# Altium PCB Clock.PcbDoc (part 2 of 2)
Units mil, origin at the board's own origin, x right, y up, seen from the top; angles counter-clockwise.
Board outline 5314.96 x 2362.2 mil, 2 copper layers (Top Layer, Bottom Layer); 149 components, 176 nets, 886 pads, 8 vias.
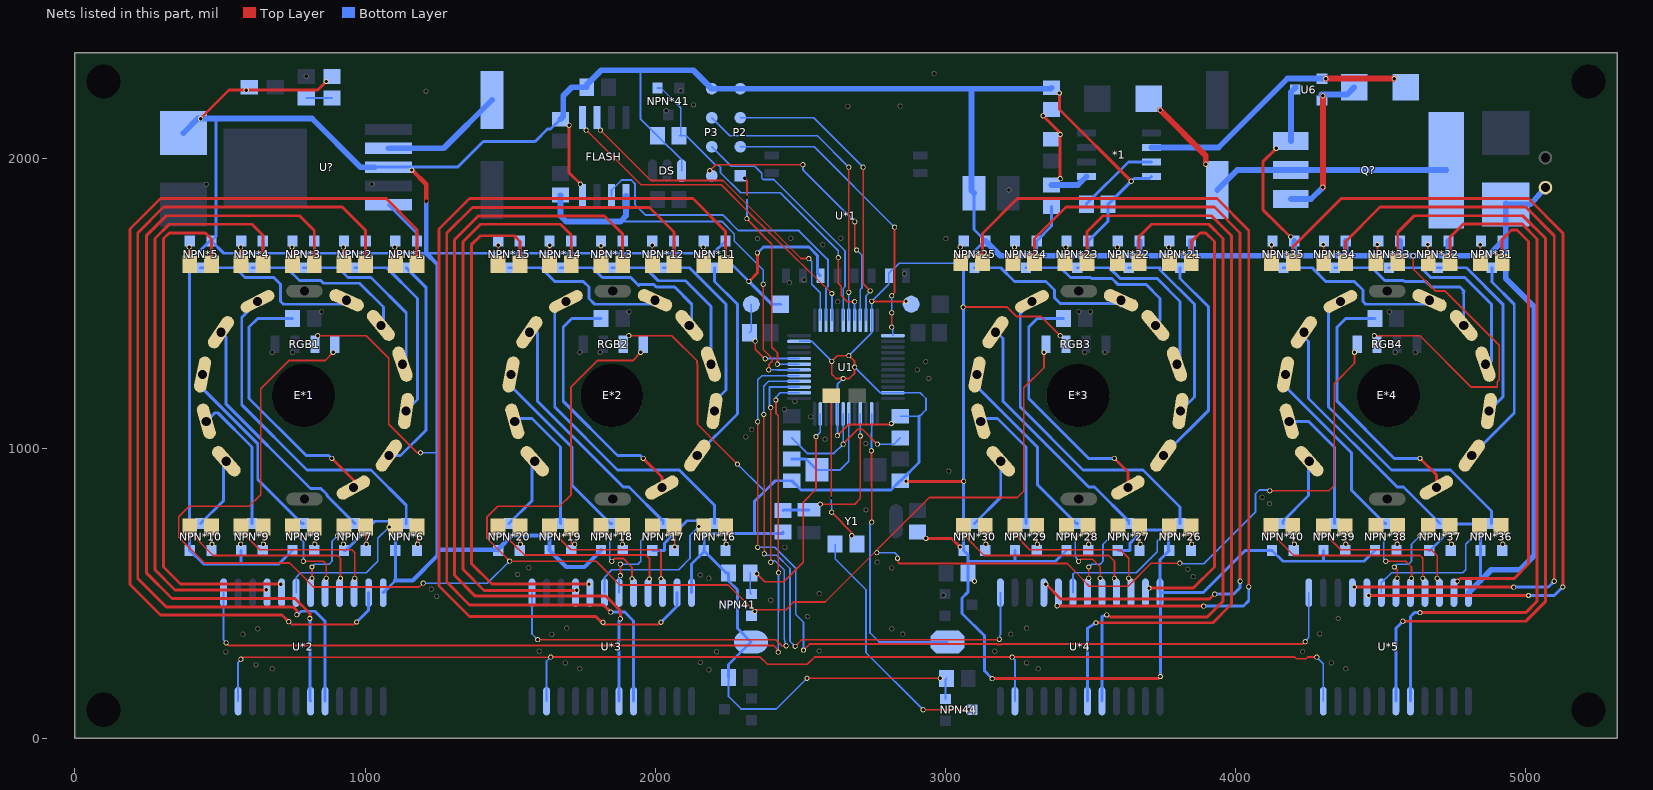
[diagram p2: the nets of this part, all layers, seen from the top]

## Via types
v1: diameter 19.68, hole 11.81, Top Layer to Bottom Layer, 3 vias
v2: diameter 11.81, hole 11.81, Top Layer to Bottom Layer, 3 vias
v3: diameter 17.72, hole 11.81, Top Layer to Bottom Layer, 2 vias

## Nets (pads, with @x,y where several pads share a name; then routed paths per layer and width w, separated by ;. In a path a pad name is that pad's centre, name@x,y a point inside that pad or via, vN(x,y) a via of type N, cw(c..) or ccw(c..) an arc to the next point about the centre after c; other vN are vias at no path point) (continued)
GND: *1.4 BAT?.2 C1.1 C2.1 C3.1 C4.1 C5.1 C6.1 C7.2 C8.1 C9.2 C10.2 C11.2 D3.2 D6.1 DS.1 FLASH.4 J1.1 NPN44.2 NPN*1.2 NPN*2.2 NPN*3.2 NPN*4.2 NPN*5.2 NPN*6.2 NPN*7.2 NPN*8.2 NPN*9.2 NPN*10.2 NPN*11.2 NPN*12.2 NPN*13.2 NPN*14.2 NPN*15.2 NPN*16.2 NPN*17.2 NPN*18.2 NPN*19.2 NPN*20.2 NPN*21.2 NPN*22.2 NPN*23.2 NPN*24.2 NPN*25.2 NPN*26.2 NPN*27.2 NPN*28.2 NPN*29.2 NPN*30.2 NPN*31.2 NPN*32.2 NPN*33.2 NPN*34.2 NPN*35.2 NPN*36.2 NPN*37.2 NPN*38.2 NPN*39.2 NPN*40.2 P2.4 P3.4 P6.1 P7.2 pad.1@3393,2224 pad.1@5068,1898 pad.2@3640.47,1920 pad.8@3161,206 pad.9@3741,213 pad.10@4140,2033 pad.11@4190,1728 pad.13@570.87,669.29 pad.16@433.07,2135.83 pad.16@925.2,669.29 pad.17@590.55,2234.25 pad.18@866.14,2263.78 pad.19@1161.42,1958.66 pad.20@1210.63,1850.39 pad.21@2523,207 pad.22@2982.28,206.69 pad.24@3100.39,541.34 pad.25@2933.07,688.98 pad.26@3051.18,659.45 pad.27@2864.17,885.83 pad.28@3062.99,885.83 pad.29@2627.95,1043.31 pad.30@2814,1085 pad.31@2667.32,1318.9 pad.32@2687.01,1279.53 pad.33@2647.64,1240.16 pad.34@2608.27,1299.21 pad.35@2746.06,1505.91 pad.36@2864.17,1505.91 pad.37@3395.67,1387.8 pad.38@4478.35,1387.8 pad.39@1909.45,1387.8 pad.40@836.61,1387.8 pad.41@4612,1663 pad.42@3061.02,1486.22 pad.43@2283.46,944.88 pad.44@1190.94,984.25 pad.45@1742.13,1910 pad.46@1703,2113 pad.69@2352,1673 pad.70 Q?.S R53.2 R54.2 R55.2 R56.2 R59.2 R60.2 RGB1.3 RGB2.3 RGB3.3 RGB4.3 U1.8 U1.23 U1.35 U1.47 U6.3 U*1.9 U*1.13 U*2.12 U*3.12 U*4.12 U*5.12 U?.3 U?.5 | length 31114.7
  Top Layer w6: pad.40@836.61,1387.8 1003.94,1387.8 1081.34,1310.39 1081.34,1082.85 1179.94,984.25 pad.44@1190.94,984.25 ; pad.39@1909.45,1387.8 2057.09,1387.8 2144.33,1300.55 2144.33,1290.63 2145.67,1289.29 2145.67,1082.68 pad.43@2283.46,944.88 ; pad.21@2523,207 pad.22@2982.28,206.69 ; pad.29@2627.95,1043.31 2666.65,1082 pad.30@2805.8,1082 ; pad.35@2746.06,1505.91 pad.36@2864.17,1505.91 ; pad.42@3061.02,1486.22 3213.53,1486.22 3246.31,1453.44 3330.02,1453.44 pad.37@3395.67,1387.8 ; pad.38@4478.35,1387.8 4635.83,1387.8 4812.99,1210.63 4901.57,1210.63 4901.57,1227.89 4909.29,1235.6 4909.29,1354.36 4721.57,1542.08 4688.23,1542.08 4612.66,1617.66 4612.66,1662.34 pad.41@4612,1663 ; 2608.27,1254.73 2622.84,1240.16 pad.33@2647.64,1240.16 2669.16,1240.16 2687.01,1258.01 pad.32@2687.01,1279.53 2687.01,1299.21 pad.31@2667.32,1318.9 2627.95,1318.9 pad.34@2608.27,1299.21 2608.27,1254.73
  Top Layer w10: pad.16@433.07,2135.83 531.5,2234.25 pad.17@590.55,2234.25 836.61,2234.25 pad.18@866.14,2263.78 ; pad.46@1703,2113 1702.76,1949.37 pad.45@1742.13,1910 ; pad.70@2322.83,1574.8 2352.36,1604.33 pad.69@2352,1673 ; pad.27@2864.17,885.83 pad.28@3062.99,885.83 ; pad.25@2933.07,688.98 3021.65,688.98 pad.26@3051.18,659.45 ; pad.8@3161,206 3734,206 pad.9@3741,213 ; pad.1@3393,2224 3393,2167.47 pad.2@3640.47,1920 ; pad.10@4140,2033 4094,1987 4094,1822 pad.11@4190,1728
  Top Layer w15: pad.19@1161.42,1958.66 1210.63,1909.45 pad.20@1210.63,1850.39
  Bottom Layer w6: pad.44@1190.94,984.25 1250,984.25 ; 1946,2302.68 1949,2299.68 1949,2136 1948.6,2136 R60.2@2007.6,2077 2091,1993.6 DS.1@2091,1956 ; R55.2@2252.6,210 2252.6,144.4 2296,101 2417,101 pad.21@2523,207 ; pad.43@2283.46,944.88 2372.05,856.3 2381.89,856.3 ; U1.23@2496.06,1368.11 2539.37,1368.11 pad.34@2608.27,1299.21 ; pad.29@2627.95,1043.31 U1.8@2627.95,1118.11 2627.95,1220.47 pad.33@2647.64,1240.16 ; pad.31@2667.32,1318.9 2746.06,1397.64 U1.35@2746.06,1440.94 pad.35@2746.06,1505.91 2805.12,1564.96 2805.12,1602.32 2840.4,1637.6 3058.4,1637.6 3062.99,1642.2 ; pad.32@2687.01,1279.53 2775.59,1190.94 U1.47@2818.9,1190.94 2913.39,1190.94 2933.07,1171.26 2933.07,1131.89 2911.42,1110.24 ; J1.1@2844.49,1110.24 2909,1110.24 ; NPN44.2@3000.08,135.83 3000.08,202.83 R59.2@3003.94,206.69
  Bottom Layer w10: 486,2135.83 486,1730.02 NPN*5.2@470.47,1714.49 ; NPN*9.2@572.83,647.72 572.83,602.36 570.87,600.39 ; NPN*4.2@647.64,1714.49 647.64,1673.91 649.61,1671.94 ; NPN*8.2@750,647.72 702.68,600.39 570.87,600.39 ; NPN*3.2@824.8,1714.49 824.8,1673.91 826.77,1671.94 ; NPN*7.2@927.17,647.72 933.15,647.72 1033.64,748.2 1090.9,748.2 1091.76,747.35 1093.2,747.35 1104.33,736.22 NPN*6.2@1104.33,647.72 1104.33,543.9 U*2.12@1062.4,501.97 ; NPN*2.2@1001.97,1714.49 1001.97,1679.82 994.09,1671.94 ; U?.3@1032.48,1968.5 U?.3@1080.71,1968.5 1318.9,1968.5 1407.48,2057.09 1586.14,2057.09 1628.7,2099.65 1639.02,2099.65 C2.1@1673.23,2133.86 ; U?.5@1080.71,1838.58 1179.13,1740.16 NPN*1.2@1179.13,1714.49 1179.13,1673.91 1181.1,1671.94 ; NPN*15.2@1533.47,1714.49 1533.47,1673.91 1535.43,1671.94 ; NPN*14.2@1710.63,1714.49 1710.63,1673.91 1712.6,1671.94 ; NPN*13.2@1887.8,1714.49 1887.8,1673.91 1889.76,1671.94 ; NPN*17.2@1990.16,647.72 2032.24,647.72 2032.24,672.63 2109.47,749.86 2158.23,749.86 2169.86,738.23 2169.86,721.77 2169,720.92 2169,708.66 ; NPN*12.2@2064.96,1714.49 2064.96,1673.91 2066.93,1671.94 ; U*3.12@2125.39,501.97 2125.39,600.64 2167.32,642.57 NPN*16.2@2167.32,647.72 ; R55.2@2252.6,210 2252.6,254.42 BAT?.2@2330.38,332.2 2283.46,379.12 2283.46,511.81 2252.6,542.68 R54.2@2252.6,570 2245.04,570 NPN*16.2@2167.32,647.72 ; pad.69@2352,1673 2372.87,1693.87 2372.99,1693.87 2529.53,1692.91 2559.06,1663.39 2559.06,1604.33 U*1.13@2568.9,1594.49 ; P6.1@2431.1,1496.06 2401.57,1496.06 2242.13,1655.51 NPN*11.2@2242.13,1714.49 2199.58,1671.94 2066.93,1671.94 ; C4.1@2440.94,710.63 2440.94,706.54 2342.52,706.54 ; 2909,1110.24 2909,950.78 2846.02,887.8 C6.1@2844.49,887.8 2812.99,856.3 2501.97,856.3 C5.1@2470.47,887.8 2413.39,887.8 2381.89,856.3 2342.52,816.93 2342.52,706.54 ; C9.2@3098.74,1879.06 3098.74,1753.54 NPN*25.2@3137.8,1714.49 3135.28,1714.49 3062.99,1642.2 pad.28@3062.99,885.83 NPN*30.2@3062.99,647.72 3077.4,633.31 3077.4,610.24 ; pad.8@3161,206 3134.33,232.67 3134.33,353.46 3057.56,430.23 3057.56,483.93 3077.4,503.77 R56.2@3077.4,570 3077.4,610.24 ; NPN*29.2@3240.16,647.72 3240.16,612.2 3238.19,610.24 ; 3307.09,1663.39 3314.96,1671.26 NPN*24.2@3314.96,1714.49 3366.14,1765.67 R53.2@3366.14,1832.68 ; NPN*28.2@3417.32,647.72 3379.84,610.24 3238.19,610.24 ; 3494.09,1663.39 3492.13,1665.35 NPN*23.2@3492.13,1714.49 3561.02,1783.39 C7.2@3561.02,1840.55 pad.2@3640.47,1920 3649.61,1929.13 3703.15,1929.13 *1.4@3710.63,1936.61 ; NPN*27.2@3594.49,647.72 3636.58,647.72 3636.58,672.63 3682.62,718.68 3758.23,718.68 3769.86,707.04 3769.86,690.59 3769,689.74 3769,647.72 NPN*26.2@3771.65,647.72 3739.57,615.63 U*4.12@3739.57,501.97 ; pad.9@3741,213 3741,500.54 U*4.12@3739.57,501.97 ; NPN*39.2@4303.15,647.72 4303.15,610.31 ; NPN*38.2@4480.31,647.72 4442.91,610.31 4303.15,610.31 ; NPN*37.2@4667.32,647.72 4669.84,647.72 4760.31,738.19 4822.83,738.19 4844.49,716.54 NPN*36.2@4844.49,647.72 4844.49,543.9 ; NPN*5.2@470.47,1714.49 464.49,1714.49 395.23,1645.23 395.23,648.15 NPN*10.2@395.67,647.72 442.99,600.39 570.87,600.39 ; NPN*5.2@470.47,1714.49 513.02,1671.94 649.61,1671.94 ; 649.61,1671.94 826.77,1671.94 ; 826.77,1671.94 994.09,1671.94 ; 994.09,1671.94 1181.1,1671.94 ; 1181.1,1671.94 1210.63,1671.94 1535.43,1671.94 ; 1535.43,1671.94 1712.6,1671.94 ; 1712.6,1671.94 1889.76,1671.94 ; 1889.76,1671.94 2066.93,1671.94 ; NPN*16.2@2167.32,647.72 2169,647.72 2169,708.66 ; 2169,708.66 2178.67,708.66 2180.79,706.54 2342.52,706.54 ; 3077.4,610.24 3238.19,610.24 ; U*4.12@3739.57,501.97 3887.8,501.97 4033.54,647.72 NPN*40.2@4125.98,647.72 4163.39,610.31 4303.15,610.31
  Bottom Layer w15: 1104.33,543.9 1163.98,543.9 1250,629.92 1250,649.61 ; pad.20@1210.63,1850.39 1210.63,1671.94 1250,1632.57 1250,984.25 1250,649.61 ; NPN*18.2@1812.99,647.72 1755.83,590.55 1692.99,590.55 NPN*19.2@1635.83,647.72 1635.83,687.01 1624.02,698.82 1505.91,698.82 1458.66,651.57 NPN*20.2@1458.66,647.72 1456.77,649.61 1250,649.61
  Bottom Layer w20: C11.2@374.02,2086.61 423.23,2135.83 pad.16@433.07,2135.83 816.93,2135.83 984.25,1968.5 U?.3@1032.48,1968.5 ; C2.1@1673.23,2133.86 1683.07,2143.7 1683.07,2214.57 1712.6,2244.09 C1.1@1763.78,2244.09 1763.78,2252.69 1813.76,2302.68 1946,2302.68 2131.18,2302.68 P3.4@2194.88,2238.98 P2.4@2293.31,2238.98 3090,2238.98 ; C9.2@3098.74,1879.06 3090,1887.8 3090,2238.98 ; NPN*25.2@3137.8,1714.49 3188.9,1663.39 3307.09,1663.39 3494.09,1663.39 3664,1663.39 ; C8.1@3366.14,2242.13 3362.99,2238.98 3090,2238.98 ; NPN*22.2@3669.29,1714.49 3669.29,1668.68 3664,1663.39 ; NPN*21.2@3846.46,1714.49 3846.46,1665.35 3848.43,1663.39 ; Q?.S@4190.94,2058.66 4190.94,2227.36 U6.3@4207.68,2244.09 ; 4202.44,1663.7 NPN*35.2@4202.44,1714.25 ; 4379.61,1663.7 NPN*34.2@4379.61,1714.25 ; NPN*33.2@4566.61,1714.25 4566.61,1672.91 4557.09,1663.39 ; NPN*32.2@4733.94,1714.25 4733.94,1663.7 4734.25,1663.39 ; U*5.12@4802.56,501.97 4844.49,543.9 4881.3,580.71 4980.31,580.71 5029.53,629.92 5029.53,1486.22 4931.1,1584.65 NPN*31.2@4931.1,1724.41 ; C10.2@4932.59,1843.85 C10.2@4931.1,1840.55 ; pad.1@5068,1898 5016.55,1840.55 C10.2@4931.1,1840.55 ; 3664,1663.39 3848.43,1663.39 ; 3848.43,1663.39 4557.09,1663.39 ; 4557.09,1663.39 4734.25,1663.39 ; 4734.25,1663.39 4870.08,1663.39 NPN*31.2@4920.95,1714.25 NPN*31.2@4931.1,1724.41 ; NPN*31.2@4931.1,1724.41 C10.2@4931.1,1840.55
INT: pad.3@572,272.62 pad.7@4280,280 pad.11@1640,280 pad.16@3230,280 U*2.23 U*3.23 U*4.23 U*5.23 | length 4360.3
  Top Layer w6: pad.3@572,272.62 578.41,279.03 606,279.03 pad.11@1640,280 2362,280 2387,255 2524,255 2549,280 pad.16@3230,280 4204,280 4210,274 4243,274 4249,280 pad.7@4280,280
  Bottom Layer w6: U*2.23@562.4,127.95 562.4,262.4 pad.3@572,272.62 ; U*3.23@1625.39,127.95 1625.39,265.39 pad.11@1640,280 ; pad.16@3230,280 3239.57,270.43 U*4.23@3239.57,127.95 ; pad.7@4280,280 4302.56,257.44 U*5.23@4302.56,127.95
Net*1_3: *1.3 C7.1 | length 285.8
  Bottom Layer w10: C7.1@3486.22,1840.55 3486.22,1842.08 3630.76,1986.61 *1.3@3710.63,1986.61
Net*1_5: *1.5 C8.2 pad.0@3395.67,2081 pad.13@3336.61,2145.67 pad.14@3395.67,1929.13 R52.2 R53.1 | length 373.1
  Top Layer w10: pad.13@3336.61,2145.67 3395.67,2086.61 pad.14@3395.67,1929.13
  Bottom Layer w20: R53.1@3366.14,1907.48 3457.09,1907.48 *1.5@3486.22,1936.61
NetBAT?_1: BAT?.1 pad.12@2745,991 pad.29@2746.06,745.08 U1.2 | length 1037.7
  Top Layer w6: pad.12@2745,991 pad.29@2746.06,745.08
  Bottom Layer w6: pad.12@2745,991 U1.2@2746.06,1118.11 ; pad.29@2746.06,745.08 2740,739.02 2740,363.35 2771.14,332.2 BAT?.1@3007.54,332.2
NetC4_2: C4.2 pad.10@2707,1042 pad.13@2568.9,807.09 U1.4 Y1.1 | length 526.7
  Top Layer w6: pad.13@2568.9,807.09 2598.43,807.09 2657.48,807.09 2687.01,807.09 2706.69,826.77 pad.10@2707,1042
  Bottom Layer w6: U1.4@2706.69,1118.11 pad.10@2707,1042
  Bottom Layer w10: C4.2@2440.94,785.43 2442.91,787.4 Y1.1@2529.53,787.4
NetC5_2: C5.2 U1.6 Y2.2 | length 388
  Bottom Layer w6: Y2.2@2557.09,925.2 2637.8,925.2 2667.32,954.72 U1.6@2667.32,1118.11
  Bottom Layer w10: C5.2@2470.47,962.6 2519.68,962.6 Y2.2@2557.09,925.2
NetD3_1: D3.1 R3.1 | length 88.6
  Bottom Layer w6: R3.1@797.24,2206.69 D3.1@885.83,2206.69
NetD4_2: D4.2 pad.9@4301.18,1899.61 pad.10@4301.18,2214.57 Q?.G U6.2 | length 565.9
  Top Layer w20: pad.9@4301.18,1899.61 pad.10@4301.18,2214.57
  Bottom Layer w20: Q?.G@4190.94,1858.66 4260.24,1858.66 pad.9@4301.18,1899.61 ; pad.10@4296.26,2218.5 4383.86,2218.5 D4.2@4409.45,2244.09
NetD5_1: D5.1 L1.1 Q?.D | length 1070
  Top Layer w20: v3(3740.16,2165.35) 3897.64,2007.87 v3(3897.64,1978.35)
  Bottom Layer w20: L1.1@3937.01,1890 4005.67,1958.66 Q?.D@4190.94,1958.66 Q?.D@4726.38,1958.66
NetD7_2: D7.2 pad.5@2608,779 pad.6@2677.17,698.82 R58.1 | length 510.7
  Top Layer w6: v2(2606.85,828.19) D7.2@2606.85,1181.17 ; pad.5@2608,779 2677.17,708.66 pad.6@2677.17,698.82
  Bottom Layer w6: v2(2606.85,828.19) pad.5@2608,779
NetE*1_2: E*1.2 pad.6@885.83,964.57 R7.1 | length 910.1
  Top Layer w10: pad.6@885.83,964.57 959.88,890.51 E*1.2@959.88,864.13
  Bottom Layer w10: R7.1@750,1446.85 629.92,1446.85 600.39,1417.32 600.39,1171.26 797.24,974.41 875.98,974.41 pad.6@885.83,964.57
NetE*1_3: E*1.3 NPN*1.3 | length 752.9
  Bottom Layer w10: E*1.3@1081.93,974.37 1122.01,974.37 1210.63,1062.99 1210.63,1553.07 NPN*1.3@1141.73,1621.97
NetE*1_4: E*1.4 NPN*2.3 | length 665
  Bottom Layer w10: NPN*2.3@964.57,1621.97 1074.88,1621.97 1181.1,1515.75 1181.1,1168.03 E*1.4@1140.98,1127.91
NetE*1_5: E*1.5 NPN*3.3 | length 601.1
  Bottom Layer w10: NPN*3.3@787.4,1621.97 906.94,1621.97 940.64,1588.27 1020,1588.27 1141.73,1466.54 1141.73,1301.89 E*1.5@1129.17,1289.33
NetE*1_6: E*1.6 NPN*4.3 | length 575.6
  Bottom Layer w10: NPN*4.3@610.24,1621.97 729.77,1621.97 773.79,1577.95 847.11,1577.95 856.8,1568.27 980.94,1568.27 1062.99,1486.22 1062.99,1431.81 E*1.6@1054.37,1423.19
NetE*1_7: E*1.7 NPN*5.3 | length 595.6
  Bottom Layer w10: NPN*5.3@433.07,1621.97 552.61,1621.97 586.31,1588.27 685.35,1588.27 708.66,1564.96 708.66,1505.91 718.5,1496.06 922.52,1496.06 E*1.7@936.26,1509.8
NetE*1_9: E*1.9 NPN*6.3 | length 1151.2
  Bottom Layer w10: E*1.9@629.92,1505.12 575,1450.2 575,1150 800.27,924.73 1020.14,924.73 1141.73,803.14 NPN*6.3@1141.73,740.24
NetE*1_10: E*1.10 NPN*7.3 | length 871.1
  Bottom Layer w10: E*1.10@503.19,1399.57 520,1382.76 520,1153.23 811.81,861.42 847.11,861.42 868.58,839.95 868.58,836.22 NPN*7.3@964.57,740.24
NetE*1_11: E*1.11 NPN*8.3 | length 660.7
  Bottom Layer w10: E*1.11@440.2,1253.9 440.2,1204.75 629.92,1015.02 629.92,892.26 781.94,740.24 NPN*8.3@787.4,740.24
NetE*1_12: E*1.12 NPN*9.3 | length 482.3
  Bottom Layer w10: E*1.12@452.76,1092.52 482.28,1122.05 492.13,1122.05 609.92,1004.25 609.92,740.55 NPN*9.3@610.24,740.24
NetE*1_13: E*1.13 NPN*10.3 | length 251.2
  Bottom Layer w10: NPN*10.3@433.07,740.24 511.81,818.98 511.81,944.88 E*1.13@521.65,954.72
NetE*2_2: E*2.2 pad.7@1958.66,964.57 R8.1 | length 882.2
  Top Layer w10: pad.7@1958.66,964.57 2022.87,900.35 E*2.2@2022.87,864.13
  Bottom Layer w10: R8.1@1812.99,1446.85 1712.6,1446.85 1683.07,1417.32 1683.07,1161.42 1870.08,974.41 1948.82,974.41 pad.7@1958.66,964.57
NetE*2_3: E*2.3 NPN*11.3 | length 737.6
  Bottom Layer w10: E*2.3@2144.92,974.37 2144.92,979.64 2283.46,1118.18 2283.46,1496.06 2204.72,1574.8 NPN*11.3@2204.72,1621.97
NetE*2_4: E*2.4 NPN*12.3 | length 653.5
  Bottom Layer w10: NPN*12.3@2027.56,1621.97 2118.19,1621.97 2244.09,1496.06 2244.09,1200.79 2203.98,1160.67 E*2.4@2203.98,1127.91
NetE*2_5: E*2.5 NPN*13.3 | length 596.5
  Bottom Layer w10: NPN*13.3@1850.39,1621.97 1965.17,1621.97 2010.11,1577.04 2104.07,1577.04 2192.17,1488.94 E*2.5@2192.17,1289.33
NetE*2_6: E*2.6 NPN*14.3 | length 583.7
  Bottom Layer w10: NPN*14.3@1673.23,1621.97 1783.98,1621.97 1817.68,1588.27 1915.67,1588.27 1943.32,1560.61 1946.21,1563.5 1995.36,1563.5 2003.74,1555.12 2066.93,1555.12 2125.98,1496.06 2125.98,1431.81 E*2.6@2117.36,1423.19
NetE*2_7: E*2.7 NPN*15.3 | length 584.1
  Bottom Layer w10: NPN*15.3@1496.06,1621.97 1606.38,1621.97 1653.54,1574.8 1751.97,1574.8 1771.65,1555.12 1771.65,1515.75 1791.34,1496.06 1985.51,1496.06 E*2.7@1999.25,1509.8
NetE*2_9: E*2.9 NPN*16.3 | length 1134.5
  Bottom Layer w10: E*2.9@1692.17,1505.87 1653.54,1467.24 1653.54,1141.73 1870.08,925.2 2082.67,925.2 2204.72,803.14 NPN*16.3@2204.72,740.24
NetE*2_10: E*2.10 NPN*17.3 | length 877.4
  Bottom Layer w10: E*2.10@1566.18,1399.57 1592.56,1399.57 1594.49,1397.64 1594.49,1161.42 1889.76,866.14 1909.45,866.14 2027.56,748.03 NPN*17.3@2027.56,740.24
NetE*2_11: E*2.11 NPN*18.3 | length 660.7
  Bottom Layer w10: E*2.11@1503.19,1253.9 1503.19,1213.35 1712.6,1003.94 1712.6,872.57 1844.94,740.24 NPN*18.3@1850.39,740.24
NetE*2_12: E*2.12 NPN*19.3 | length 466
  Bottom Layer w10: E*2.12@1515.75,1092.52 1525.59,1102.36 1574.8,1102.36 1673.23,1003.94 NPN*19.3@1673.23,740.24
NetE*2_13: E*2.13 NPN*20.3 | length 251.2
  Bottom Layer w10: NPN*20.3@1496.06,740.24 1574.8,818.98 1574.8,944.88 E*2.13@1584.65,954.72
NetE*3_2: E*3.2 pad.8@3582.68,964.57 R29.1 | length 879
  Top Layer w10: pad.8@3582.68,964.57 3629.17,918.07 E*3.2@3629.17,864.13
  Bottom Layer w10: R29.1@3407.48,1446.85 3316.93,1446.85 3287.4,1417.32 3287.4,1171.26 3494.09,964.57 pad.8@3582.68,964.57
NetE*3_3: E*3.3 NPN*21.3 | length 753.1
  Bottom Layer w10: E*3.3@3751.22,974.37 3907.48,1130.63 3907.48,1486.22 3809.06,1584.65 NPN*21.3@3809.06,1621.97
NetE*3_4: E*3.4 NPN*22.3 | length 671.1
  Bottom Layer w10: NPN*22.3@3631.89,1621.97 3740.16,1621.97 3740.16,1614.17 3858.27,1496.06 3858.27,1175.91 E*3.4@3810.28,1127.91
NetE*3_5: E*3.5 NPN*23.3 | length 623.4
  Bottom Layer w10: NPN*23.3@3454.72,1621.97 3565.04,1621.97 3602.36,1584.65 3730.31,1584.65 3809.06,1505.91 3809.06,1299.92 E*3.5@3798.46,1289.33
NetE*3_6: E*3.6 NPN*24.3 | length 606
  Bottom Layer w10: NPN*24.3@3277.56,1621.97 3397.09,1621.97 3430.79,1588.27 3500.32,1588.27 3503.94,1584.65 3574.08,1584.65 3594.08,1564.65 3691.26,1564.65 3740.16,1515.75 3740.16,1439.69 E*3.6@3723.66,1423.19
NetE*3_7: E*3.7 NPN*25.3 | length 596.3
  Bottom Layer w10: NPN*25.3@3100.39,1621.97 3191.02,1621.97 3238.19,1574.8 3346.46,1574.8 3375.98,1545.28 3375.98,1518.24 3395.67,1498.56 3596.4,1498.56 3605.55,1489.41 E*3.7@3605.55,1509.8
NetE*3_9: E*3.9 NPN*26.3 | length 1131.8
  Bottom Layer w10: E*3.9@3298.46,1505.87 3257.87,1465.28 3257.87,1141.73 3474.41,925.2 3681.1,925.2 3809.06,797.24 NPN*26.3@3809.06,740.24
NetE*3_10: E*3.10 NPN*27.3 | length 863.9
  Bottom Layer w10: E*3.10@3172.48,1399.57 3177.2,1399.57 3198.82,1377.95 3198.82,1161.42 3494.09,866.14 3513.78,866.14 3631.89,748.03 NPN*27.3@3631.89,740.24
NetE*3_11: E*3.11 NPN*28.3 | length 658.7
  Bottom Layer w10: E*3.11@3109.49,1253.9 3109.49,1211.38 3316.93,1003.94 3316.93,874.54 3451.23,740.24 NPN*28.3@3454.72,740.24
NetE*3_12: E*3.12 NPN*29.3 | length 464.1
  Bottom Layer w10: E*3.12@3122.05,1092.52 3131.89,1102.36 3179.13,1102.36 3277.56,1003.94 NPN*29.3@3277.56,740.24
NetE*3_13: E*3.13 NPN*30.3 | length 252
  Bottom Layer w10: NPN*30.3@3100.39,740.24 3190.94,830.79 E*3.13@3190.94,954.72
NetE*4_2: E*4.2 pad.9@4635.83,964.57 R30.1 | length 888.8
  Top Layer w10: pad.9@4635.83,964.57 4692.17,908.23 E*4.2@4692.17,864.13
  Bottom Layer w10: R30.1@4480.31,1446.85 4379.92,1446.85 4350.39,1417.32 4350.39,1161.42 4547.24,964.57 pad.9@4635.83,964.57
NetE*4_3: E*4.3 NPN*31.3 | length 741.3
  Bottom Layer w10: E*4.3@4814.21,974.37 4960.63,1120.79 4960.63,1496.06 4881.89,1574.8 4883.54,1576.46 NPN*31.3@4883.54,1621.73
NetE*4_4: E*4.4 NPN*32.3 | length 664.8
  Bottom Layer w10: NPN*32.3@4696.54,1621.73 4795.59,1621.73 4921.26,1496.06 4921.26,1175.91 E*4.4@4873.27,1127.91
NetE*4_5: E*4.5 NPN*33.3 | length 626.1
  Bottom Layer w10: NPN*33.3@4529.21,1621.73 4638.9,1621.73 4672.61,1588.03 4789.92,1588.03 4881.89,1496.06 4881.89,1299.21 4872.01,1289.33 E*4.5@4861.46,1289.33
NetE*4_6: E*4.6 NPN*34.3 | length 593.5
  Bottom Layer w10: NPN*34.3@4342.2,1621.73 4470.79,1621.73 4514.57,1577.95 4579.39,1577.95 4582.54,1574.8 4655.51,1574.8 4675.2,1555.12 4773.62,1555.12 4788.39,1540.35 ; 4783.46,1535.43 4786.65,1532.24 E*4.6@4786.65,1423.19
NetE*4_7: E*4.7 NPN*35.3 | length 584.3
  Bottom Layer w10: NPN*35.3@4165.04,1621.73 4264.09,1621.73 4311.02,1574.8 4409.45,1574.8 4438.98,1545.28 4438.98,1505.91 4448.82,1496.06 4654.8,1496.06 E*4.7@4668.54,1509.8
NetE*4_9: E*4.9 NPN*36.3 | length 1134.5
  Bottom Layer w10: E*4.9@4361.46,1505.87 4360.2,1505.87 4320.87,1466.54 4320.87,1141.73 4537.4,925.2 4740.37,925.2 4881.89,783.68 NPN*36.3@4881.89,740.24
NetE*4_10: E*4.10 NPN*37.3 | length 866.4
  Bottom Layer w10: E*4.10@4235.47,1399.57 4235.47,1384.61 4251.97,1368.11 4251.97,1171.26 4557.09,866.14 4578.82,866.14 NPN*37.3@4704.72,740.24
NetE*4_11: E*4.11 NPN*38.3 | length 658.7
  Bottom Layer w10: E*4.11@4172.48,1253.9 4172.48,1211.38 4399.61,984.25 4399.61,854.86 4514.23,740.24 NPN*38.3@4517.72,740.24
NetE*4_12: E*4.12 NPN*39.3 | length 455.9
  Bottom Layer w10: E*4.12@4185.04,1092.52 4251.97,1092.52 4340.55,1003.94 NPN*39.3@4340.55,740.24
NetE*4_13: E*4.13 NPN*40.3 | length 252
  Bottom Layer w10: NPN*40.3@4163.39,740.24 4163.39,748.03 4251.97,836.61 4251.97,952.76 E*4.13@4253.94,954.72
NetJ1_2: J1.2 pad.17@2765.75,1013.78 pad.18@2647.64,1013.78 R6.1 U1.7 | length 565.5
  Top Layer w6: pad.18@2647.64,1013.78 2647.64,1014.64 2698,1065 2714.53,1065 pad.17@2765.75,1013.78
  Bottom Layer w6: R6.1@2470.47,1035.43 2523.91,982 2615.86,982 pad.18@2647.64,1013.78 U1.7@2647.64,1118.11 ; pad.17@2765.75,1013.78 2822.83,1013.78 J1.2@2844.49,1035.43
NetL2_2: L2.2 U?.2 | length 425.2
  Bottom Layer w20: U?.2@1080.71,2033.46 1270.71,2033.46 L2.2@1437.01,2199.76
NetNPN44_3: NPN44.3 pad.3@2923.23,98.43 pad.4@3080.71,98.43 R58.2 | length 853.9
  Top Layer w6: pad.3@2923.23,98.43 pad.4@3080.71,98.43
  Bottom Layer w6: R58.2@2620.08,669.29 2620.08,618.11 2726.38,511.81 2726.38,295.28 pad.3@2923.23,98.43
NetNPN*1_1: NPN*1.1 pad.30@1102.36,1692.91 R18.2 | length 57.1
  Top Layer w10: R18.2@1104.33,1633.86 pad.30@1104.33,1690.95
NetNPN*2_1: NPN*2.1 pad.29@925.2,1692.91 R9.2 | length 57.1
  Top Layer w10: R9.2@927.16,1633.86 pad.29@927.16,1690.95
NetNPN*3_1: NPN*3.1 pad.28@748.03,1692.91 R10.2 | length 57.1
  Top Layer w10: R10.2@750,1633.86 pad.28@750,1690.95
NetNPN*4_1: NPN*4.1 pad.27@570.87,1692.91 R11.2 | length 57.1
  Top Layer w10: R11.2@572.83,1633.86 pad.27@572.83,1690.95
NetNPN*5_1: NPN*5.1 pad.26@393.7,1692.91 R12.2 | length 57.1
  Top Layer w10: R12.2@395.67,1633.86 pad.26@395.67,1690.94
NetNPN*6_1: NPN*6.1 pad.19@1181.1,669.29 R13.2 | length 59.9
  Top Layer w6: R13.2@1179.13,728.35 1179.13,671.26 pad.19@1181.1,669.29
NetNPN*7_1: NPN*7.1 pad.17@1003.94,669.29 R14.2 | length 59.9
  Top Layer w6: R14.2@1001.97,728.35 1001.97,671.26 pad.17@1003.94,669.29
NetNPN*8_1: NPN*8.1 pad.15@826.77,669.29 R15.2 | length 59.9
  Top Layer w6: R15.2@824.8,728.35 824.8,671.26 pad.15@826.77,669.29
NetNPN*9_1: NPN*9.1 pad.14@649.61,669.29 R17.2 | length 59.9
  Top Layer w6: R17.2@647.64,728.35 647.64,671.26 pad.14@649.61,669.29
NetNPN*10_1: NPN*10.1 pad.12@472.44,669.29 R16.2 | length 59.9
  Top Layer w6: R16.2@470.47,728.35 470.47,671.26 pad.12@472.44,669.29
NetNPN*11_1: NPN*11.1 pad.49@2165.35,1692.91 R28.2 | length 57.1
  Top Layer w6: R28.2@2167.32,1633.86 pad.49@2167.32,1690.94
NetNPN*12_1: NPN*12.1 pad.48@1990,1700 R19.2 | length 66.1
  Top Layer w6: pad.48@1990,1700 R19.2@1990.16,1633.86
NetNPN*13_1: NPN*13.1 pad.47@1813,1698 R20.2 | length 64.1
  Top Layer w6: R20.2@1812.99,1633.86 pad.47@1813,1698
NetNPN*14_1: NPN*14.1 pad.46@1636,1699 R21.2 | length 65.1
  Top Layer w6: R21.2@1635.83,1633.86 pad.46@1636,1699
NetNPN*15_1: NPN*15.1 pad.45@1459,1700 R22.2 | length 66.1
  Top Layer w6: R22.2@1458.66,1633.86 pad.45@1459,1700
NetNPN*16_1: NPN*16.1 pad.44@2244.09,669.29 R23.2 | length 59.9
  Top Layer w6: R23.2@2242.13,728.35 2242.13,671.26 pad.44@2244.09,669.29
NetNPN*17_1: NPN*17.1 pad.43@2066.93,659.45 R24.2 | length 78.8
  Top Layer w6: R24.2@2064.96,728.35 pad.43@2066.93,659.45 2066.93,669.29
NetNPN*18_1: NPN*18.1 pad.66@1887,669 R25.2 | length 66
  Top Layer w6: R25.2@1887.4,730 pad.66@1887,669 pad.66@1890,665
NetNPN*19_1: NPN*19.1 pad.41@1722.44,669.29 R27.2 | length 69.1
  Top Layer w6: R27.2@1710.63,728.35 1710.63,671.26 pad.41@1722.44,669.29
NetNPN*20_1: NPN*20.1 pad.40@1535.43,669.29 R26.2 | length 59.9
  Top Layer w6: R26.2@1533.46,728.35 1533.46,671.26 pad.40@1535.43,669.29
NetNPN*21_1: NPN*21.1 pad.16@3769.69,1692.91 R41.2 | length 54.2
  Top Layer w6: pad.16@3769.69,1692.91 3772.76,1689.84 R41.2@3772.76,1640
NetNPN*22_1: NPN*22.1 pad.15@3592.52,1692.91 R32.2 | length 53
  Top Layer w6: pad.15@3592.52,1692.91 3592.76,1692.68 R32.2@3592.76,1640
NetNPN*23_1: NPN*23.1 pad.14@3415.35,1692.91 R33.2 | length 54
  Top Layer w6: R33.2@3412.76,1640 3412.76,1690.32 pad.14@3415.35,1692.91
NetNPN*24_1: NPN*24.1 pad.13@3238.19,1692.91 R34.2 | length 55.2
  Top Layer w6: R34.2@3232.76,1640 3232.76,1687.48 pad.13@3238.19,1692.91
NetNPN*25_1: NPN*25.1 pad.12@3051.18,1692.91 R35.2 | length 52.9
  Top Layer w6: pad.12@3051.18,1692.91 R35.2@3052.76,1640
NetNPN*26_1: NPN*26.1 pad.7@3848.43,669.29 R36.2 | length 59.9
  Top Layer w6: R36.2@3846.46,728.35 3846.46,671.26 pad.7@3848.43,669.29
NetNPN*27_1: NPN*27.1 pad.8@3671.26,669.29 R37.2 | length 59.9
  Top Layer w6: R37.2@3669.23,728.35 3669.23,671.32 pad.8@3671.26,669.29
NetNPN*28_1: NPN*28.1 pad.9@3494.09,669.29 R38.2 | length 61.6
  Top Layer w6: R38.2@3492.01,730 3492.01,671.38 pad.9@3494.09,669.29
NetNPN*29_1: NPN*29.1 pad.10@3316.93,669.29 R40.2 | length 61.6
  Top Layer w6: R40.2@3314.78,730 3314.78,671.44 pad.10@3316.93,669.29
NetNPN*30_1: NPN*30.1 pad.11@3139.76,669.29 R39.2 | length 61.6
  Top Layer w6: R39.2@3137.56,730 3137.56,671.5 pad.11@3139.76,669.29
NetNPN*31_1: NPN*31.1 pad.21@4843,1701 R51.2 | length 61.2
  Top Layer w6: pad.21@4843,1701 R51.2@4844.25,1639.76
NetNPN*32_1: NPN*32.1 pad.20@4663,1702 R42.2 | length 62.2
  Top Layer w6: pad.20@4663,1702 R42.2@4664.25,1639.76
NetNPN*33_1: NPN*33.1 pad.19@4489,1702 R43.2 | length 63.9
  Top Layer w6: R43.2@4484.25,1639.76 4488.19,1643.7 pad.19@4489,1702
NetNPN*34_1: NPN*34.1 pad.18@4302,1702 R44.2 | length 62.4
  Top Layer w6: pad.18@4302,1702 4304.25,1689.84 R44.2@4304.25,1639.76
NetNPN*35_1: NPN*35.1 pad.17@4124,1701 R45.2 | length 61.2
  Top Layer w6: pad.17@4124,1701 4124.25,1692.68 R45.2@4124.25,1639.76
NetNPN*36_1: NPN*36.1 pad.2@4921.26,669.29 R46.2 | length 59.9
  Top Layer w6: R46.2@4919.29,728.35 4919.29,671.26 pad.2@4921.26,669.29
NetNPN*37_1: NPN*37.1 pad.3@4744.09,669.29 R47.2 | length 62.9
  Top Layer w6: R47.2@4738.82,730 4738.82,674.57 pad.3@4744.09,669.29
NetNPN*38_1: NPN*38.1 pad.4@4557.09,669.29 R48.2 | length 61.2
  Top Layer w6: pad.4@4557.09,669.29 4558.35,670.55 R48.2@4558.35,730
NetNPN*39_1: NPN*39.1 pad.5@4379.92,669.29 R50.2 | length 59.9
  Top Layer w6: R50.2@4377.87,728.35 4377.87,671.34 pad.5@4379.92,669.29
NetNPN*40_1: NPN*40.1 pad.6@4202.76,669.29 R49.2 | length 62.9
  Top Layer w6: R49.2@4197.4,730 4197.4,674.65 pad.6@4202.76,669.29
NetR19_1: pad.56@1847,435 R19.1 U*3.17 | length 3144.9
  Top Layer w10: pad.56@1847,435 1820,460 1360,460 1281.5,538.5 1281.5,1741.5 1370,1830 1980,1830 2064.96,1745.04 R19.1@2064.96,1633.86
  Bottom Layer w10: pad.56@1847,435 1895,435 1925.39,404.61 U*3.17@1925.39,127.95
NetR20_1: pad.55@1880,412 R20.1 U*3.18 | length 2835.4
  Top Layer w10: pad.55@1880,412 1880,440 1830,490 1380,490 1308.07,561.93 1308.07,1718.07 1390,1800 1825.59,1800 1887.8,1737.8 R20.1@1887.8,1633.86
  Bottom Layer w10: U*3.18@1875.39,127.95 1875.39,405.39 pad.55@1880,412
NetR21_1: pad.51@1730,510 R21.1 U*3.4 | length 2065.4
  Top Layer w10: R21.1@1710.63,1633.86 1710.63,1734.25 1673.23,1771.65 1397.64,1771.65 1337.6,1711.61 1337.6,582.4 1410,510 pad.51@1730,510
NetR22_1: pad.50@1771.65,531.5 R22.1 U*3.5 | length 1800.6
  Top Layer w10: R22.1@1533.46,1633.86 1533.46,1712.6 1513.78,1732.28 1397.64,1732.28 1366.14,1700.79 1366.14,602.36 1437.01,531.5 pad.50@1771.65,531.5
NetR23_1: pad.62@2150,730 R23.1 U*3.6 | length 497.2
  Bottom Layer w6: U*3.6@1825.39,501.97 1825.39,555.39 1850.71,580.71 2080.71,580.71 2120,620 2120,700 pad.62@2150,730
NetR24_1: pad.61@1970,700 pad.63@1879.92,600.39 pad.64@1879.92,561.02 R24.1 U*3.7 | length 272.8
  Top Layer w6: pad.64@1879.92,561.02 pad.63@1879.92,600.39
  Bottom Layer w6: U*3.7@1875.39,501.97 1875.39,556.5 pad.64@1879.92,561.02 ; pad.63@1879.92,600.39 1890,600 1940,600 1950,610 1950,680 pad.61@1970,700
NetR25_1: pad.67 pad.68 pad.69@1920,550 R25.1 U*3.8 | length 222.6
  Top Layer w6: pad.68@1850,610 1860.08,620.08 1889.92,620.08 1920,590 pad.69@1920,550
  Bottom Layer w6: pad.67@1837,698 1843.21,696.79 1843.21,616.79 pad.68@1850,610
NetR26_1: pad.0@1980,549 R26.1 U*3.9 | length 641.6
  Top Layer w6: R26.1@1458.66,728.35 1458.66,722.73 1517.57,663.82 1517.57,661.89 1528.04,651.43 1529.96,651.43 1549.31,632.08 1967.92,632.08 1980,620 pad.0@1980,549
NetR27_1: pad.1@2020,550 R27.1 U*3.10 | length 514.1
  Top Layer w6: R27.1@1635.83,728.35 1635.83,722.73 1705.76,652.79 1707.21,652.79 1710,650 2010,650 2020,640 pad.1@2020,550
NetR28_1: pad.58@1820,400 pad.59@2020,400 R28.1 U*3.11 | length 3370.5
  Top Layer w6: pad.58@1820,395 1820,392.5 2012.5,392.5 pad.59@2020,400
  Top Layer w10: pad.58@1820,395 1795,420 1360,420 1254.92,525.08 1254.92,1754.92 1360,1860 2130,1860 2242.13,1747.87 R28.1@2242.13,1633.86
  Bottom Layer w10: pad.59@2020,400 2075.39,455.39 U*3.11@2075.39,501.97
NetR32_1: pad.43@3556.1,425.2 R32.1 U*4.17 | length 2399.8
  Top Layer w10: pad.43@3556.1,425.2 3567.91,418.31 3902.56,418.31 3956.38,472.13 3956.38,550.87 3956.69,551.18 3956.69,1722.44 3907.48,1771.65 3710.63,1771.65 3667.56,1728.58 R32.1@3667.56,1640
  Bottom Layer w10: U*4.17@3539.57,127.95 3539.57,419.49 pad.43@3556.1,425.2
NetR33_1: pad.44@3519.02,398.31 R33.1 U*4.18 | length 2705.7
  Top Layer w10: R33.1@3487.56,1640 3487.56,1745.43 3543.31,1801.18 3917.32,1801.18 3986.22,1732.28 3986.22,462.6 3921.93,398.31 pad.44@3519.02,398.31
  Bottom Layer w10: U*4.18@3489.57,127.95 3489.57,379.33 pad.44@3519.02,398.31
NetR34_1: pad.40@4015.75,541.34 pad.45@3928.15,497.05 pad.47@3346.46,531.5 R34.1 U*4.4 | length 2801.3
  Top Layer w10: R34.1@3307.56,1640 3307.56,1722.91 3415.35,1830.71 3927.17,1830.71 4015.75,1742.13 pad.40@4015.75,541.34 ; pad.47@3346.46,531.5 3397.64,480.32 3910.43,480.32 pad.45@3927.17,497.05
  Bottom Layer w10: pad.45@3928.15,497.05 3994.09,497.05 4015.75,518.7 pad.40@4015.75,541.34
NetR35_1: pad.41@4045.59,521.97 pad.46@3889.76,455.71 pad.48@3384.84,456.69 R35.1 U*4.5 | length 3058.2
  Top Layer w10: R35.1@3127.56,1640 3127.56,1739.76 3248.03,1860.24 3935.76,1860.24 4045.59,1750.41 pad.41@4045.59,521.97 pad.41@4045.28,521.65 ; pad.48@3384.84,456.69 pad.46@3889.76,455.71
  Bottom Layer w10: pad.46@3889.76,455.71 4026.98,455.71 4045.59,474.32 pad.41@4045.59,521.97
NetR36_1: pad.35@3750,698.82 R36.1 U*4.6 | length 450.5
  Bottom Layer w6: U*4.6@3439.57,501.97 3439.57,565.55 3444.88,570.87 3658.46,570.87 3730.31,642.72 3730.31,679.13 pad.35@3750,698.82
NetR37_1: pad.23@3494.09,551.18 pad.25@3572.83,698.82 pad.39@3494.09,590.55 R37.1 U*4.7 | length 197.5
  Top Layer w6: pad.23@3494.09,551.18 pad.39@3494.09,590.55
  Bottom Layer w6: pad.39@3494.09,590.55 3503.94,600.39 3533.46,600.39 3543.31,610.24 3543.31,669.29 pad.25@3572.83,698.82
NetR38_1: pad.22@3533.46,551.18 pad.24@3441,699 pad.38@3459,610 R38.1 U*4.8 | length 224.4
  Top Layer w6: pad.38@3459,610 3465.82,616.88 3506.96,617.06 3533.46,590.55 pad.22@3533.46,551.18
  Bottom Layer w6: pad.24@3441,699 3447.54,696.16 3447.54,627.26 pad.38@3459,610
NetR39_1: pad.33@3582.68,551.18 R39.1 U*4.9 | length 645.4
  Top Layer w6: R39.1@3062.76,730 3062.76,701.24 3134.08,629.92 3562.99,629.92 3582.68,610.24 pad.33@3582.68,551.18
NetR40_1: pad.34@3631.89,551.18 R40.1 U*4.10 | length 523.3
  Top Layer w6: R40.1@3239.98,730 3239.98,701.02 3291.39,649.61 3602.36,649.61 3631.89,620.08 pad.34@3631.89,551.18
NetR41_1: pad.44@3701.77,517.72 R41.1 U*4.11 | length 1553.8
  Top Layer w10: pad.44@3701.77,517.72 3714.57,517.72 3854.33,517.72 3927.17,590.55 3927.17,1712.6 3897.64,1742.13 3877.95,1742.13 3847.56,1711.73 R41.1@3847.56,1640
NetR42_1: pad.51@4635.83,433.07 R42.1 U*5.17 | length 2426.4
  Top Layer w10: pad.51@4635.83,433.07 5000,433.07 5039.37,472.44 5039.37,1721.2 4988.6,1771.97 4783.78,1771.97 4739.06,1727.24 R42.1@4739.06,1639.76
  Bottom Layer w10: U*5.17@4602.56,127.95 4602.56,419.49 4616.14,433.07 pad.51@4635.83,433.07
NetR43_1: pad.52@4576.77,403.54 R43.1 U*5.18 | length 2726.7
  Top Layer w10: R43.1@4559.06,1639.76 4559.06,1744.09 4616.14,1801.18 4990.16,1801.18 5068.9,1722.44 5068.9,472.44 5000,403.54 pad.52@4576.77,403.54
  Bottom Layer w10: U*5.18@4552.56,127.95 4552.56,379.33 pad.52@4576.77,403.54
NetR44_1: pad.49@5098.43,541.34 pad.56@4958.16,521 pad.58@4409.45,521.65 R44.1 U*5.4 | length 2769.6
  Top Layer w10: R44.1@4379.06,1639.76 4379.06,1711.73 4498.03,1830.71 5000,1830.71 5098.43,1732.28 pad.49@5098.43,541.34 ; pad.58@4409.45,521.65 4745.34,521.65 4745.65,521.34 pad.56@4958.16,521
  Bottom Layer w10: pad.56@4958.16,521 5078.74,521.65 pad.49@5098.43,541.34
NetR45_1: pad.50@5127.95,521.65 pad.57@5009.84,492.13 pad.59@4458.66,492.13 R45.1 U*5.5 | length 3003.5
  Top Layer w10: R45.1@4199.06,1639.76 4199.06,1695.05 4364.24,1860.24 5009.84,1860.24 5127.95,1742.13 pad.50@5127.95,521.65 ; pad.59@4458.66,492.13 pad.57@5009.84,492.13
  Bottom Layer w10: pad.57@5009.84,492.13 5098.43,492.13 pad.50@5127.95,521.65
NetR46_1: pad.32@4822.83,698.82 R46.1 U*5.6 | length 473.7
  Bottom Layer w6: U*5.6@4502.56,501.97 4502.56,536.02 4537.4,570.87 4783.46,570.87 4793.31,580.71 4793.31,669.29 pad.32@4822.83,698.82
NetR47_1: pad.27@4635.83,698.82 pad.29@4557.09,551.18 pad.37@4547.24,590.55 R47.1 U*5.7 | length 211.5
  Top Layer w6: pad.37@4547.24,590.55 4557.09,580.71 pad.29@4557.09,551.18
  Bottom Layer w6: pad.37@4547.24,590.55 4557.09,600.39 4596.46,600.39 4606.3,610.24 4606.3,669.29 pad.27@4635.83,698.82
NetR48_1: pad.26@4507.87,698.82 pad.28@4606.3,551.18 pad.36@4517.72,610.24 R48.1 U*5.8 | length 228.8
  Top Layer w6: pad.36@4517.72,610.24 4586.61,610.24 4606.3,590.55 pad.28@4606.3,551.18
  Bottom Layer w6: pad.26@4507.87,698.82 4510.53,696.16 4510.53,617.42 pad.36@4517.72,610.24
NetR49_1: pad.30@4645.67,551.18 R49.1 U*5.9 | length 650.2
  Top Layer w6: R49.1@4122.6,730 4122.6,708.4 4142.22,688.78 4201.08,629.92 4635.83,629.92 4645.67,620.08 pad.30@4645.67,551.18
NetR50_1: pad.31@4694.88,551.18 R50.1 U*5.10 | length 522.7
  Top Layer w6: R50.1@4303.07,728.35 4303.07,708.93 4362.39,649.61 4675.2,649.61 4694.88,629.92 pad.31@4694.88,551.18
NetR51_1: pad.60@4763.78,541.34 R51.1 U*5.11 | length 1583.4
  Top Layer w10: pad.60@4763.78,541.34 4773.62,551.18 4960.63,551.18 5009.84,600.39 5009.84,1712.6 4970.47,1751.97 4950.79,1751.97 4919.06,1720.24 R51.1@4919.06,1639.76
O/F: NPN*41.1 pad.18@2631,1657 pad.20@2687,1505 R60.1 U1.32 | length 1205.2
  Top Layer w6: pad.18@2631,1657 2631,1567.97 2641,1557.97 2641,1526 2662,1505 pad.20@2687,1505
  Bottom Layer w6: NPN*41.1@2007.6,2241.26 2019.74,2241.26 2088,2173 R60.1@2088,2077 ; R60.1@2082.4,2077 2107,2077 2206.89,1977.11 2215.89,1977.11 2225,1968 2225,1949.87 2294.96,1879.91 2431.09,1879.91 2631,1680 pad.18@2631,1657 ; U1.32@2687.01,1440.94 pad.20@2687,1505
PA12: P3.1 pad.21@2694,1683 pad.22@2688,1780 pad.23@2509,1977 pad.24@2188,1956 U1.33 | length 952.9
  Top Layer w6: pad.24@2188,1956 2209,1977 pad.23@2509,1977 ; pad.22@2688,1780 2688,1689 pad.21@2694,1683
  Bottom Layer w6: pad.23@2509,1977 2509,1959 pad.22@2688,1780 ; pad.21@2694,1683 2713,1664 2713,1553 2706.69,1546.69 U1.33@2706.69,1440.94
PA13: P2.3 pad.56@2716.54,1968.5 pad.59@2741,1542 U1.34 | length 1037.1
  Top Layer w6: pad.56@2716.54,1968.5 2716.54,1566.46 pad.59@2741,1542
  Bottom Layer w6: P2.3@2293.31,2138.98 2546.06,2138.98 pad.56@2716.54,1968.5 ; U1.34@2726.38,1440.94 2726.38,1525.59 pad.59@2741,1542
PA14: P2.2 pad.57@2824.8,1761.81 pad.60@2814.96,1525.59 pad.61@2814.96,1466.54 pad.62@2814.96,1417.32 U1.37 | length 1026
  Top Layer w6: pad.62@2814.96,1417.32 pad.61@2814.96,1466.54 ; pad.60@2814.96,1525.59 2824.8,1535.43 pad.57@2824.8,1761.81
  Bottom Layer w6: P2.2@2293.31,2038.98 2547.64,2038.98 pad.57@2824.8,1761.81 ; pad.62@2814.96,1417.32 2818.9,1413.39 U1.37@2818.9,1387.8 ; pad.61@2814.96,1466.54 pad.60@2814.96,1525.59
PB0: FLASH.1 pad.51@2372.05,1564.96 pad.52@2391,1270 R57.2 U1.18 | length 1420.8
  Top Layer w6: pad.51@2372.05,1564.96 2372.05,1340.22 2403,1309.26 2403,1300 2392.22,1289.22 pad.52@2392.22,1274
  Bottom Layer w6: 1879.92,1781.5 2229.21,1781.5 2272.34,1738.37 2272.34,1713.88 2372.05,1614.17 pad.51@2372.05,1564.96 ; pad.52@2391,1270 2421.26,1269.69 U1.18@2496.06,1269.69
  Bottom Layer w20: R57.2@1673.23,1872.05 1673.23,1801.18 1692.91,1781.5 1879.92,1781.5 1899.61,1801.18 FLASH.1@1899.61,1870.08
PB1: P2.1 pad.53@2421.26,1289.37 pad.54@2316,1791 U1.19 | length 761.2
  Top Layer w6: v2(2309,1930) 2316,1923 v2(2316,1865) ; pad.54@2316,1791 2401.57,1702.76 2401.57,1348.43 2421.26,1328.74 pad.53@2421.26,1289.37
  Bottom Layer w6: pad.54@2316,1791 2316,1833.72 v2(2316,1865) ; pad.53@2421.26,1289.37 U1.19@2496.06,1289.37
PB2: P6.2 pad.4@2378.94,1308.07 pad.5@2344.49,1369.09 R4.1 U1.20 | length 297.4
  Top Layer w6: pad.5@2344.49,1369.09 2344.49,1341.54 2378.94,1307.09 pad.4@2378.94,1308.07
  Bottom Layer w6: R4.1@2324.8,1397.64 2331.1,1403.94 P6.2@2331.1,1496.06 ; pad.4@2376.97,1309.06 U1.20@2496.06,1309.06
PB13: FLASH.6 pad.48@1811.02,2096.46 pad.49@2529.53,1653.54 U1.26 | length 1130.9
  Top Layer w6: pad.48@1811.02,2096.46 1984.98,1922.5 2233.46,1922.5 2502.42,1653.54 pad.49@2529.53,1653.54
  Bottom Layer w6: pad.49@2529.53,1653.54 2539.37,1643.7 2539.37,1564.96 2568.9,1535.43 U1.26@2568.9,1440.94
PB14: FLASH.2 U1.27 | length 1146.9
  Bottom Layer w6: FLASH.2@1849.54,1870.08 1849.54,1889.69 1883.85,1924 1918,1924 1930,1912 1930,1840 1966,1804 2233,1804 2287.02,1749.98 2495.18,1749.98 2595.18,1649.99 2595.18,1557.13 2588.58,1550.53 U1.27@2588.58,1440.94
PB15: FLASH.5 pad.47@1761.81,2096.46 pad.50@2609,1533 U1.28 | length 1171.8
  Top Layer w6: pad.47@1761.81,2096.46 1950.77,1907.5 2227.25,1907.5 2327.5,1807.25 2327.5,1806.36 pad.50@2609,1533
  Bottom Layer w6: pad.50@2609,1533 U1.28@2609.27,1439.94
PWM: *1.2 D4.1 pad.11@4547.24,2273.62 pad.12@4311.02,2273.62 U6.1 | length 935.2
  Top Layer w20: pad.12@4311.02,2273.62 pad.11@4547.24,2273.62
  Bottom Layer w20: *1.2@3710.63,2036.61 3941.28,2036.61 4178.76,2274.09 4310.55,2274.09 pad.12@4311.02,2273.62
R: NPN41.2 pad.7@890,1330 pad.10@1950,1330 pad.11@3340,1330 pad.14@4410,1330 pad.32@2343,437 pad.38@1200,535 pad.43@1498,611 pad.45@4118,853.03 pad.48@3808,604 pad.51@2835,620 pad.53@2763.78,639.76 RGB1.4 RGB2.4 RGB3.4 RGB4.4 | length 8301.2
  Top Layer w6: pad.7@890,1330 861.87,1301.87 737.38,1301.87 640,1204.49 640,840 600,800 394.53,800 357.58,763.05 357.58,693.64 446.89,604.33 740.44,604.33 799.07,545.7 799.07,543.78 821.2,521.65 1186.65,521.65 pad.38@1200,535 ; pad.10@1950,1330 1921.87,1301.87 1800.37,1301.87 1710,1211.5 1710,840 1670,800 1457.52,800 1420.57,763.05 1420.57,688.68 1489.17,620.08 pad.43@1498,611 1506.14,610 1796.67,610 1878.12,528.54 2251.46,528.54 pad.32@2343,437 ; pad.32@2342.52,434.06 pad.32@2343,437 ; pad.51@2835,620 2839.57,602.36 3419.58,602.36 3476.24,545.7 3476.24,543.78 3496.02,524 3629.96,524 3708.36,602.39 pad.48@3808,604 ; pad.11@3340,1330 3340,1277.63 3270,1207.63 3270,852.43 3247.57,830 2945,830 2585,470 2478,470 2451.5,443.5 2349.5,443.5 pad.32@2343,437 ; pad.45@4118,853.03 4323.27,854.33 4340,871.06 4340,1222.43 4410,1292.43 pad.14@4410,1330
  Bottom Layer w6: pad.38@1200,535 1421.68,534.68 pad.43@1498,611 ; pad.53@2763.78,639.76 2825,639.76 2837.6,627.17 pad.51@2835,620 ; pad.48@3808,604 3816.93,601.38 3890.28,601.38 4068.44,779.55 4068.44,842.2 4082,855.76 4115.27,855.76 pad.45@4118,853.03
R_CTRL: NPN41.1 pad.3@2554,1040 pad.5@2350,567 R54.1 U1.11 | length 808.6
  Top Layer w6: pad.5@2350,567 2377,540 2443,540 2510,607 2510,814 2554,858 pad.3@2554,1040
  Bottom Layer w6: R54.1@2327.4,570 2327.4,501.26 NPN41.1@2331.26,497.4 ; pad.3@2554,1040 2568.9,1054.9 U1.11@2568.9,1118.11
RX: P3.2 U1.30 | length 859.5
  Bottom Layer w6: P3.2@2194.88,2038.98 2262.38,1971.48 2342.52,1971.48 2366.98,1947.02 2366.98,1931.31 2372.26,1926.04 2408.96,1926.04 2654.23,1680.77 2654.23,1557.13 2647.64,1550.53 U1.30@2647.64,1440.94
ST1: pad.6@2416,1166 pad.14@2424,297 pad.18@521.2,328.8 pad.20@2425,571 U1.14 U*2.1 | length 3079
  Top Layer w6: pad.18@521.2,328.8 530,320 2408,320 2424,304 pad.14@2424,297 ; pad.6@2416,1166 2416.46,1119.54 2424,1112 2424,572 pad.20@2425,571
  Bottom Layer w6: U*2.1@512.4,501.97 512.4,337.6 pad.18@521.2,328.8 ; pad.6@2416,1166 2416.46,1176.46 2430.94,1190.94 U1.14@2496.06,1190.94 ; pad.14@2424,297 2425.17,571 2425.2,577.76 pad.20@2425,571
ST2: pad.7@2398,1140 pad.21@1595,340 pad.21@2398,607 pad.24@2451,319 U1.15 U*3.1 | length 2077.8
  Top Layer w6: pad.21@1595,340 2415,340 2436,319 pad.24@2451,319 ; pad.21@2398,607 pad.7@2398,1140
  Bottom Layer w6: U*3.1@1575.39,501.97 1575.39,359.61 pad.21@1595,340 ; pad.21@2398,607 2412.2,612.8 2445,580 2445,342.96 pad.24@2451,319 ; pad.7@2398,1140 2393.7,1133.92 2393.7,1210.63 U1.15@2496.06,1210.63
ST3: pad.8@2374,1116 pad.22@2376,636 pad.24@3186,341 pad.26@2482,317 U1.16 U*4.1 | length 1974
  Top Layer w6: pad.8@2374,1116 pad.22@2376,636 ; pad.26@2482,317 2504,339 2504,340.05 pad.24@3186,341
  Bottom Layer w6: pad.8@2374,1116 2374,1214 2390,1230 2390,1230.32 U1.16@2496.06,1230.32 ; pad.22@2376,636 2373.26,630.67 2419.08,630.67 2464.57,585.19 2464.57,334.43 pad.26@2482,317 ; pad.24@3186,341 3189.57,359.57 U*4.1@3189.57,501.97
ST4: pad.9@2353,1091 pad.23@2353,658 pad.23@4240,333 pad.25@2511,304 U1.17 U*5.1 | length 3097
  Top Layer w6: pad.23@2353,658 pad.9@2353,1091 ; pad.25@2511,304 2532,325 3176.74,325 3178.6,323.14 3193.4,323.14 3195.26,325 4232,325 pad.23@4240,333
  Bottom Layer w6: pad.23@2353,658 2412.51,658.46 2484.25,586.72 2484.25,426.75 2511,400 pad.25@2511,304 ; pad.9@2353,1091 2353.35,1134.84 2353.35,1235.24 2368.11,1250 U1.17@2496.06,1250 ; pad.23@4240,333 4252.56,347.56 U*5.1@4252.56,501.97
TX: P3.3 pad.55@2667.32,1968.5 pad.58@2667.32,1537 U1.31 | length 1070.6
  Top Layer w6: pad.58@2667.32,1537 pad.55@2667.32,1968.5
  Bottom Layer w6: P3.3@2194.88,2138.98 2257.09,2076.77 2559.05,2076.77 pad.55@2667.32,1968.5 ; U1.31@2667.32,1440.94 pad.58@2667.32,1537
Y0: pad.30@971,401 pad.31@737,402 R18.1 U*2.11 | length 3381.3
  Top Layer w6: pad.31@737,402 746.5,392.5 962.5,392.5 pad.30@971,401
  Top Layer w10: pad.31@737,402 714,425 295,425 190,530 190,1755 295,1860 1073.27,1860 1179.13,1754.13 R18.1@1179.13,1633.86
  Bottom Layer w10: pad.30@971,401 1012.4,442.4 U*2.11@1012.4,501.97
Y1: pad.10@915.35,551.18 R16.1 U*2.9 | length 643.4
  Top Layer w6: R16.1@395.67,728.35 395.67,711.33 477.08,629.92 905.51,629.92 915.35,620.08 pad.10@915.35,551.18
Y2: pad.11@964.57,551.18 R17.1 U*2.10 | length 525.3
  Top Layer w6: R17.1@572.83,728.35 572.83,714.17 637.39,649.61 954.72,649.61 964.57,639.76 pad.11@964.57,551.18
Y3: pad.9@866.14,551.18 pad.22@787.4,610.24 pad.25@758,697 R15.1 U*2.8 | length 239
  Top Layer w6: pad.22@787.4,614.92 792.09,610.24 856.3,610.24 866.14,600.39 pad.9@866.14,551.18
  Bottom Layer w6: pad.25@758,697 768.4,697 787.4,678 pad.22@787.4,610.24
Y4: pad.21@816.93,551.18 pad.23@816.93,590.55 pad.24@905.51,698.82 R14.1 U*2.7 | length 213.2
  Top Layer w6: pad.21@816.93,551.18 pad.23@816.93,590.55
  Bottom Layer w6: pad.23@816.93,590.55 826.77,600.39 875.98,600.39 885.83,610.24 885.83,679.13 pad.24@905.51,698.82
Y5: pad.20@1082.68,728.35 R13.1 U*2.6 | length 491.6
  Bottom Layer w6: U*2.6@762.4,501.97 762.4,555.71 777.56,570.87 1003.94,570.87 1043.31,610.24 1043.31,688.98 pad.20@1082.68,728.35
Y6: pad.26@708.66,531.5 R12.1 U*2.5 | length 1829
  Top Layer w10: R12.1@470.47,1633.86 470.47,1720.47 448.82,1742.13 324.8,1742.13 305.12,1722.44 305.12,590.55 364.17,531.5 pad.26@708.66,531.5
Y7: pad.25@659.45,511.5 R11.1 U*2.4 | length 2062.6
  Top Layer w10: R11.1@647.64,1633.86 647.64,1734.25 610.24,1771.65 324.8,1771.65 275.59,1722.44 275.59,580.71 344.8,511.5 pad.25@659.45,511.5
Y8: pad.27@810,413 R10.1 U*2.18 | length 2831.5
  Top Layer w10: pad.27@810,413 810,430.16 757.87,482.28 334.65,482.28 246.06,570.87 246.06,1732.28 314.96,1801.18 773.62,1801.18 824.8,1750 R10.1@824.8,1633.86
  Bottom Layer w10: pad.27@810,413 810,130.35 U*2.18@812.4,127.95
Y9: pad.29@765,426 R9.1 U*2.17 | length 3162.1
  Top Layer w10: pad.29@765,426 765,440 752.24,452.76 314.96,452.76 216.54,551.18 216.54,1742.13 305.12,1830.71 921.26,1830.71 1001.97,1750 R9.1@1001.97,1633.86
  Bottom Layer w10: pad.29@765,426 780,438 827,438 862.4,402.6 U*2.17@862.4,127.95
pads on no net: E*1.1 E*1.8 E*2.1 E*2.8 E*3.1 E*3.8 E*4.1 E*4.8 U1.1 U1.25 U1.38 U1.39 U1.40 U1.41 U*1.1 U*1.2 U*1.10 U*1.11 U*1.21 U*1.22 U*2.13 U*2.14 U*2.15 U*2.16 U*2.19 U*2.20 U*3.13 U*3.14 U*3.15 U*3.16 U*3.19 U*3.20 U*4.13 U*4.14 U*4.15 U*4.16 U*4.19 U*4.20 U*5.13 U*5.14 U*5.15 U*5.16 U*5.19 U*5.20 U?.6 Y1.3

## Keep-outs
Keep-Out Layer:
  the board outline again, w10

## Silkscreen, mask and mechanical layers (free items; w line width, h text height)
Top Overlay:
  drawing of 22403 lines, arcs and shapes, not listed
  text "In your life," at 573,2065 h150
  text "there will at least one time that you forget yourself for someone, asking for no result," at 562,1946 h150
  text "no company, no ownership nor love. Just ask for meeting you in my most beautiful years." at 560,1827 h150
  text "NixieClock" at 2023,339 h300
  text "@dudu" at 4675,30 h80
Bottom Overlay:
  text "+" at 5165,2040 h120 r180
  text "-" at 5152,1922 h120 r180
  text "QQ : 1025389563" at 5107,1459 h80 r90
  text "Data : 2016/12/31" at 5280,1459 h80 r90
  text "Author : Sadudu" at 5197,1452 h80 r90

## Text inside footprints (layer, text, board x,y; h text height)
U*1: Bottom Overlay "BlueTooth" at 2647.64,1781.5 h47.24 r270